# EAGLE board CT_schematic (EAGLE 7.6.0)

Size 100 x 80 mm. Coordinates in mm from the lower left corner, seen from the top.
Outline: 0,0 100,0 100,80 0,80 0,0
Copper layers (1*16): Top 0.035mm / dielectric 1.5mm / Bottom 0.035mm
Design rules "default": minimum track width 10mil, minimum drill 24mil, track to track 8mil, track to pad 8mil, pad to pad 8mil, via to via 8mil, smd to smd 8mil, copper to edge 40mil, drill to drill 8mil, minimum pad ring 10mil, minimum via ring 8mil, stop-mask expansion 4mil, vias tented up to drill 0mil, thermal gap 10mil

## Footprints (pad centres in the part's own frame; a part is rotated, then mirrored left to right if it is on the bottom)
C0603 = smd 0.8 x 0.8: 1 -0.762,0; 2 0.762,0
C0402 = smd 0.5 x 0.5: 1 -0.508,0; 2 0.508,0
C0805 = smd 1.2 x 1.3: 1 -1.016,0; 2 1.016,0
2220 = smd 1.85 x 5.5: 1 -2.55,0; 2 2.55,0
C1210 = smd 1.2 x 2.5: 1 -1.524,0; 2 1.524,0
EXV-9H = smd 3.505 x 1.676: 1 -2.857,0; 2 2.857,0
L0603 = smd 0.8 x 0.8: 1 -0.762,0; 2 0.762,0
L1210 = smd 1.2 x 2.5: 1 -1.524,0; 2 1.524,0
IND_PM3316 = smd 2.921 x 2.794: 1 -5.144,0; 2 5.144,0
PJ-037B_PACKAGE = drill 3.7 square: 1 12,0 | drill 3.2 square: 2 6,0
R0603 = smd 0.8 x 0.8: 1 -0.762,0; 2 0.762,0
WLCSP143 = smd 0.25 x 0.25: A1 -1.999,2.405; A2 -1.599,2.405; A3 -1.199,2.405; A4 -0.799,2.405; A5 -0.399,2.405; A6 0.001,2.405; A7 0.401,2.405; A8 0.801,2.405; A9 1.201,2.405; A10 1.601,2.405; A11 2.001,2.405; B1 -1.999,2.005; B2 -1.599,2.005; B3 -1.199,2.005; B4 -0.799,2.005; B5 -0.399,2.005; B6 0.001,2.005; B7 0.401,2.005; B8 0.801,2.005; B9 1.201,2.005; B10 1.601,2.005; B11 2.001,2.005; C1 -1.999,1.605; C2 -1.599,1.605; C3 -1.199,1.605; C4 -0.799,1.605; C5 -0.399,1.605; C6 0.001,1.605; C7 0.401,1.605; C8 0.801,1.605; C9 1.201,1.605; C10 1.601,1.605; C11 2.001,1.605; D1 -1.999,1.205; D2 -1.599,1.205; D3 -1.199,1.205; D4 -0.799,1.205; D5 -0.399,1.205; D6 0.001,1.205; D7 0.401,1.205; D8 0.801,1.205; D9 1.201,1.205; D10 1.601,1.205; D11 2.001,1.205; E1 -1.999,0.805; E2 -1.599,0.805; E3 -1.199,0.805; E4 -0.799,0.805; E5 -0.399,0.805; E6 0.001,0.805; E7 0.401,0.805; E8 0.801,0.805; E9 1.201,0.805; E10 1.601,0.805; E11 2.001,0.805; F1 -1.999,0.405; F2 -1.599,0.405; F3 -1.199,0.405; F4 -0.799,0.405; F5 -0.399,0.405; F6 0.001,0.405; F7 0.401,0.405; F8 0.801,0.405; F9 1.201,0.405; F10 1.601,0.405; F11 2.001,0.405; G1 -1.999,0.005; G2 -1.599,0.005; G3 -1.199,0.005; G4 -0.799,0.005; G5 -0.399,0.005; G6 0.001,0.005; G7 0.401,0.005; G8 0.801,0.005; G9 1.201,0.005; G10 1.601,0.005; G11 2.001,0.005; H1 -1.999,-0.395; H2 -1.599,-0.395; H3 -1.199,-0.395; H4 -0.799,-0.395; H5 -0.399,-0.395; H6 0.001,-0.395; H7 0.401,-0.395; H8 0.801,-0.395; H9 1.201,-0.395; H10 1.601,-0.395; H11 2.001,-0.395; J1 -1.999,-0.795; J2 -1.599,-0.795; J3 -1.199,-0.795; J4 -0.799,-0.795; J5 -0.399,-0.795; J6 0.001,-0.795; J7 0.401,-0.795; J8 0.801,-0.795; J9 1.201,-0.795; J10 1.601,-0.795; J11 2.001,-0.795; K1 -1.999,-1.195; K2 -1.599,-1.195; K3 -1.199,-1.195; K4 -0.799,-1.195; K5 -0.399,-1.195; K6 0.001,-1.195; K7 0.401,-1.195; K8 0.801,-1.195; K9 1.201,-1.195; K10 1.601,-1.195; K11 2.001,-1.195; L1 -1.999,-1.595; L2 -1.599,-1.595; L3 -1.199,-1.595; L4 -0.799,-1.595; L5 -0.399,-1.595; L6 0.001,-1.595; L7 0.401,-1.595; L8 0.801,-1.595; L9 1.201,-1.595; L10 1.601,-1.595; L11 2.001,-1.595; M1 -1.999,-1.995; M2 -1.599,-1.995; M3 -1.199,-1.995; M4 -0.799,-1.995; M5 -0.399,-1.995; M6 0.001,-1.995; M7 0.401,-1.995; M8 0.801,-1.995; M9 1.201,-1.995; M10 1.601,-1.995; M11 2.001,-1.995; N1 -1.999,-2.395; N2 -1.599,-2.395; N3 -1.199,-2.395; N4 -0.799,-2.395; N5 -0.399,-2.395; N6 0.001,-2.395; N7 0.401,-2.395; N8 0.801,-2.395; N9 1.201,-2.395; N10 1.601,-2.395; N11 2.001,-2.395
SOIC-8 = smd 1.6 x 0.6: 1 -2.7,1.905 | smd 1.55 x 0.6: 2 -2.7,0.635; 3 -2.7,-0.635; 4 -2.7,-1.905; 5 2.7,-1.905; 6 2.7,-0.635; 7 2.7,0.635; 8 2.7,1.905
10100565 = smd 0.8 x 2.35: 1 0,0; 2 1.25,0; 3 2.55,0; 4 4.25,0; 5 5.43,0; 6 6.68,0; 7 7.93,0; 8 9.18,0; 9 11.67,0; 10 14.18,0; 11 15.43,0; 12 16.68,0; 13 17.93,0; 14 19.18,0; 15 21.68,0 | smd 1.5 x 3.1: 16 23.495,-1.375; 20 25.685,-22.875 | smd 1.55 x 3.1: 17 -1.815,-1.375; 21 -1.815,-22.875 | drill 1.1 pad 1.1: 18 21.68,-2.375; 19 0.68,-2.375
SSOP-16 = smd 1.981 x 0.356: 1 -2.464,2.223; 2 -2.464,1.587; 3 -2.464,0.953; 4 -2.464,0.318; 5 -2.464,-0.318; 6 -2.464,-0.953; 7 -2.464,-1.587; 8 -2.464,-2.223; 9 2.464,-2.223; 10 2.464,-1.587; 11 2.464,-0.953; 12 2.464,-0.318; 13 2.464,0.318; 14 2.464,0.953; 15 2.464,1.587; 16 2.464,2.223
HTSS-105-01-G-D = drill 1 pad 1.8 square: 1 0,0 | drill 1 pad 1.8: 2 0,2.54; 3 2.54,0; 4 2.54,2.54; 5 5.08,0; 6 5.08,2.54; 7 7.62,0; 8 7.62,2.54; 9 10.16,0; 10 10.16,2.54
182-009-MALE = drill 1.194 pad 1.524 octagon: 1 -5.537,10.923; 2 -2.769,10.923; 3 0,10.923; 4 2.769,10.923; 5 5.537,10.923; 6 -4.153,8.08; 7 -1.384,8.08; 8 1.384,8.08; 9 4.153,8.08 | hole 3.048: -12.446,9.501; 12.446,9.501
TSSOP20-I = smd 0.4 x 1.35: 1 -2.925,-2.875; 2 -2.275,-2.875; 3 -1.625,-2.875; 4 -0.975,-2.875; 5 -0.325,-2.875; 6 0.325,-2.875; 7 0.975,-2.875; 8 1.625,-2.875; 9 2.275,-2.875; 10 2.925,-2.875; 11 2.925,2.875; 12 2.275,2.875; 13 1.625,2.875; 14 0.975,2.875; 15 0.325,2.875; 16 -0.325,2.875; 17 -0.975,2.875; 18 -1.625,2.875; 19 -2.275,2.875; 20 -2.925,2.875
ABLS-25.000MHZ-B2F-T = smd 5.6 x 2.8: 1 -3.81,0; 2 5.69,0
ASEK = smd 1.4 x 1: 1 -1.1,-0.8; 2 1.1,-0.8; 3 1.1,0.8; 4 -1.1,0.8
QFN-16_EP = smd 0.805 x 0.3: 1 -1.452,0.75; 2 -1.452,0.25; 3 -1.452,-0.25; 4 -1.452,-0.75; 9 1.452,-0.75; 10 1.452,-0.25; 11 1.452,0.25; 12 1.452,0.75 | smd 0.3 x 0.805: 5 -0.75,-1.452; 6 -0.25,-1.452; 7 0.25,-1.452; 8 0.75,-1.452; 13 0.75,1.452; 14 0.25,1.452; 15 -0.25,1.452; 16 -0.75,1.452 | smd 1.55 x 1.55: 17 0,0
DFN-8_DDB = smd 0.805 x 0.3: 1 -0.952,0.75; 2 -0.952,0.25; 3 -0.952,-0.25; 4 -0.952,-0.75; 5 0.952,-0.75; 6 0.952,-0.25; 7 0.952,0.25; 8 0.952,0.75 | smd 0.61 x 2.2: 9 0,0
SON-6 = smd 0.55 x 0.3: 1 -0.355,0.5 | smd 0.52 x 0.3: 2 -0.37,0; 3 -0.37,-0.5; 4 0.37,-0.5; 5 0.37,0; 6 0.37,0.5
SW_4-1437565-2 = smd 1.4 x 2.1: 1 -2.23,4.55; 2 -2.23,-4.55; 3 2.23,4.55; 4 2.23,-4.55
LGM67K-G1J2-24-Z = smd 0.8 x 1.4: A -2,0; C 0,0
NC7SZ125M5X = smd 1.3 x 0.7: 1 -1.3,0.95; 2 -1.3,0; 3 -1.3,-0.95; 4 1.3,-0.95; 5 1.3,0.95
DUMMY_PACKAGE_222 = drill 0.3: 1 0,-1; 2 1.5,-1; 3 3,-1

## Placement (x,y rotation side)
C1  1e-06  [C0603]  -26.67,85.09 0 top  (outside the outline)
C2  1e-07  [C0603]  -30.48,85.09 0 top  (outside the outline)
C3  1e-07  [C0603]  -34.29,85.09 0 top  (outside the outline)
C4  1e-07  [C0603]  -38.1,85.09 0 top  (outside the outline)
C5  1e-07  [C0603]  -41.91,85.09 0 top  (outside the outline)
C6  1e-07  [C0603]  -45.72,85.09 0 top  (outside the outline)
C7  1e-07  [C0603]  -49.53,85.09 0 top  (outside the outline)
C8  1e-07  [C0603]  -53.34,85.09 0 top  (outside the outline)
C9  1e-07  [C0603]  -57.15,85.09 0 top  (outside the outline)
C10  1e-07  [C0603]  -60.96,85.09 0 top  (outside the outline)
C11  1e-07  [C0603]  -64.77,85.09 0 top  (outside the outline)
C12  1e-07  [C0603]  -68.58,85.09 0 top  (outside the outline)
C13  1e-07  [C0603]  -72.39,85.09 0 top  (outside the outline)
C14  1e-07  [C0603]  -76.2,85.09 0 top  (outside the outline)
C15  1e-07  [C0603]  -80.01,85.09 0 top  (outside the outline)
C16  4.7e-06  [C0603]  -80.01,80.01 0 top  (outside the outline)
C17  1e-08  [C0603]  -83.82,85.09 0 top  (outside the outline)
C18  1e-06  [C0603]  -87.63,85.09 0 top  (outside the outline)
C19  1e-07  [C0603]  -15.24,90.17 0 top  (outside the outline)
C20  2.2e-06  [C0603]  -83.82,80.01 0 top  (outside the outline)
C21  2.2e-06  [C0603]  -87.63,80.01 0 top  (outside the outline)
C22  1e-11  [C0402]  -72.39,90.17 0 top  (outside the outline)
C23  1e-11  [C0402]  -76.2,90.17 0 top  (outside the outline)
C24  1e-08  [C0402]  -80.01,90.17 0 top  (outside the outline)
C25  1e-07  [C0402]  -83.82,90.17 0 top  (outside the outline)
C26  1e-05  [C0805]  -83.82,67.31 0 top  (outside the outline)
C27  1e-06  [C0603]  -19.05,90.17 0 top  (outside the outline)
C28  1e-06  [C0603]  -22.86,90.17 0 top  (outside the outline)
C29  2.2e-07  [C0603]  -15.24,85.09 0 top  (outside the outline)
C30  1e-06  [C0603]  -26.67,90.17 0 top  (outside the outline)
C31  1e-06  [C0603]  -30.48,90.17 0 top  (outside the outline)
C32  1e-06  [C0603]  -34.29,90.17 0 top  (outside the outline)
C33  1e-06  [C0603]  -38.1,90.17 0 top  (outside the outline)
C34  1e-07  [C0402]  -87.63,90.17 0 top  (outside the outline)
C35  1e-07  [C0402]  -15.24,95.25 0 top  (outside the outline)
C36  1e-07  [C0402]  -19.05,95.25 0 top  (outside the outline)
C37  1e-07  [C0402]  -22.86,95.25 0 top  (outside the outline)
C38  1e-07  [C0402]  -26.67,95.25 0 top  (outside the outline)
C39  1e-07  [C0402]  -30.48,95.25 0 top  (outside the outline)
C40  1e-08  [C0402]  -34.29,95.25 0 top  (outside the outline)
C41  1e-05  [C0805]  -15.24,74.93 0 top  (outside the outline)
C42  1e-06  [C0603]  -41.91,90.17 0 top  (outside the outline)
C43  1e-07  [C0402]  -38.1,95.25 0 top  (outside the outline)
C44  6.8e-05  [2220]  -46.99,59.69 0 top  (outside the outline)
C45  1e-05  [C1210]  -59.69,67.31 0 top  (outside the outline)
C46  2.2e-06  [C0603]  -19.05,85.09 0 top  (outside the outline)
C47  2.2e-07  [C0603]  -22.86,85.09 0 top  (outside the outline)
C48  1e-07  [C0402]  -41.91,95.25 0 top  (outside the outline)
C49  0.0001  [EXV-9H]  -76.2,58.42 0 top  (outside the outline)
C50  0.0001  [EXV-9H]  -17.78,68.58 0 top  (outside the outline)
C51  1e-08  [C0402]  -45.72,95.25 0 top  (outside the outline)
F1  240.0  [L0603]  -45.72,90.17 0 top  (outside the outline)
I1  1e-05  [L1210]  -66.04,67.31 0 top  (outside the outline)
I2  1.5e-06  [IND_PM3316]  -20.32,49.53 0 top  (outside the outline)
I3  1e-05  [L1210]  -72.39,67.31 0 top  (outside the outline)
J1  PJ-037B  [PJ-037B_PACKAGE]  -27.94,36.83 0 top  (outside the outline)
R2  1000.0  [R0603]  -49.53,90.17 0 top  (outside the outline)
R7  4700.0  [R0603]  -53.34,90.17 0 top  (outside the outline)
R8  10000.0  [R0603]  -30.48,80.01 0 top  (outside the outline)
R9  10000.0  [R0603]  -35.56,80.01 0 top  (outside the outline)
R10  10000.0  [R0603]  -40.64,80.01 0 top  (outside the outline)
R11  10000.0  [R0603]  -45.72,80.01 0 top  (outside the outline)
R12  10000.0  [R0603]  -50.8,80.01 0 top  (outside the outline)
R13  10000.0  [R0603]  -55.88,80.01 0 top  (outside the outline)
R14  100000.0  [R0603]  -20.32,74.93 0 top  (outside the outline)
R15  100000.0  [R0603]  -25.4,74.93 0 top  (outside the outline)
R16  100000.0  [R0603]  -30.48,74.93 0 top  (outside the outline)
R17  100000.0  [R0603]  -35.56,74.93 0 top  (outside the outline)
R18  100000.0  [R0603]  -40.64,74.93 0 top  (outside the outline)
R19  100000.0  [R0603]  -45.72,74.93 0 top  (outside the outline)
R20  100000.0  [R0603]  -50.8,74.93 0 top  (outside the outline)
R21  100000.0  [R0603]  -55.88,74.93 0 top  (outside the outline)
R22  100000.0  [R0603]  -60.96,74.93 0 top  (outside the outline)
R23  100000.0  [R0603]  -66.04,74.93 0 top  (outside the outline)
R24  100000.0  [R0603]  -71.12,74.93 0 top  (outside the outline)
R25  100000.0  [R0603]  -76.2,74.93 0 top  (outside the outline)
R26  120.0  [R0603]  -57.15,90.17 0 top  (outside the outline)
R27  20000.0  [R0603]  -60.96,80.01 0 top  (outside the outline)
R28  91000.0  [R0603]  -66.04,80.01 0 top  (outside the outline)
R29  300000.0  [R0603]  -81.28,74.93 0 top  (outside the outline)
R30  100000.0  [R0603]  -86.36,74.93 0 top  (outside the outline)
R31  560000.0  [R0603]  -15.24,80.01 0 top  (outside the outline)
R32  10000.0  [R0603]  -71.12,80.01 0 top  (outside the outline)
R33  10000.0  [R0603]  -76.2,80.01 0 top  (outside the outline)
R34  9100.0  [R0603]  -60.96,90.17 0 top  (outside the outline)
R35  680000.0  [R0603]  -20.32,80.01 0 top  (outside the outline)
R36  120000.0  [R0603]  -25.4,80.01 0 top  (outside the outline)
U1  STM32F746ZGY6  [WLCSP143]  -39.37,49.53 0 top  (outside the outline)
U2  AT25128B-SSHL-T  [SOIC-8]  -24.13,59.69 0 top  (outside the outline)
U3  10100565  [10100565]  -40.64,25.4 0 top  (outside the outline)
U4  LTC2804CGN-1#PBF  [SSOP-16]  -80.01,35.56 0 top  (outside the outline)
U5  HTSS-105-01-G-D  [HTSS-105-01-G-D]  -58.42,48.26 0 top  (outside the outline)
U6  MCP2562-E/SN  [SOIC-8]  -38.1,59.69 0 top  (outside the outline)
U7  182-009-113R531  [182-009-MALE]  -67.31,6.35 0 top  (outside the outline)
U8  SP3203ECY-L/TR  [TSSOP20-I]  -59.69,35.56 0 top  (outside the outline)
U9  HTSS-105-01-G-D  [HTSS-105-01-G-D]  -77.47,48.26 0 top  (outside the outline)
U10  ABLS-25.000MHZ-B2F-T  [ABLS-25.000MHZ-B2F-T]  -36.83,68.58 0 top  (outside the outline)
U11  ASEK-32.768KHz-ECST  [ASEK]  -67.31,58.42 0 top  (outside the outline)
U12  LTC3601EUD#PBF  [QFN-16_EP]  -66.04,90.17 0 top  (outside the outline)
U13  LT3494AEDDB#TRMPBF  [DFN-8_DDB]  -49.53,95.25 0 top  (outside the outline)
U14  TPS3895ADRYR  [SON-6]  -60.96,93.98 0 top  (outside the outline)
U15  4-1437565-2  [SW_4-1437565-2]  -44.45,35.56 0 top  (outside the outline)
U16  Q65110A2395  [LGM67K-G1J2-24-Z]  -48.26,67.31 0 top  (outside the outline)
U17  nc7sz125m5x  [NC7SZ125M5X]  -77.47,66.04 0 top  (outside the outline)
U18  Dummy  [DUMMY_PACKAGE_222]  -58.42,95.25 0 top  (outside the outline)

## Library data of the parts
C1-C51 F1 I1-I3 J1 R2 R7-R36 U1-U18 = circuit_tree

## Nets
CLK_CRYSTAL_U1_H10: C22.1 U1.H10 U10.1
CLK_CRYSTAL_U1_J11: C23.1 U1.J11 U10.2
CLK_U1_D11: U1.D11 U11.3
GND: C1.2 C2.2 C3.2 C4.2 C5.2 C6.2 C7.2 C8.2 C9.2 C10.2 C11.2 C12.2 C13.2 C14.2 C15.2 C16.2 C17.2 C18.2 C19.2 C20.2 C21.2 C22.2 C23.2 C24.2 C25.2 C26.2 C27.2 C28.2 C30.2 C31.2 C32.2 C33.2 C34.2 C35.2 C38.2 C39.2 C40.2 C41.2 C42.2 C44.1 C44.2 C45.2 C46.2 C47.2 C48.2 C49.2 C50.2 C51.2 J1.2 R2.2 R8.2 R10.2 R27.2 R29.2 R34.2 R36.2 U1.D2 U1.E7 U1.F5 U1.H2 U1.H3 U1.H7 U1.K10 U2.4 U3.6 U3.10 U3.12 U3.16 U3.17 U3.20 U3.21 U4.8 U5.9 U6.2 U6.8 U7.5 U8.18 U9.9 U11.2 U12.1 U12.9 U12.17 U13.2 U13.9 U14.2 U16.C U17.1 U17.3 U18.1
NET_U1_A11: R9.1 U1.A11
NET_U1_C9: R8.1 U1.C9
NET_U1_D1: C21.1 U1.D1
NET_U1_H9: R7.1 U1.H9 U17.4
NET_U1_L10: C17.1 C18.1 F1.1 U1.L10 U1.L11
NET_U1_N2: C20.1 U1.N2
NET_U1_N9: U16.A
NET_U1_N10: U15.3 U15.4
NET_U1_N11: R10.1 U1.N11
NET_U2_3: R11.1 U2.3
NET_U2_7: R13.1 U2.7
NET_U3_1: R16.1 U3.1
NET_U3_2: R15.1 U3.2
NET_U3_18: U3.18 U3.19
NET_U4_6: C27.1 U4.6
NET_U4_7: C29.1 I1.2 U4.7
NET_U4_9: C28.1 U4.9
NET_U4_10: C29.2 U4.10
NET_U4_11: R25.1 U4.11
NET_U5_3: U4.1 U5.3
NET_U5_4: U4.2 U5.4
NET_U5_5: U4.3 U5.5
NET_U5_6: U4.4 U5.6
NET_U6_6: R26.2 U6.6
NET_U7_2: R26.2 U6.6 U7.2
NET_U7_3: R26.1 U6.7 U7.3
NET_U8_1: C36.1 U8.1
NET_U8_2: C38.1 U8.2
NET_U8_3: C36.2 U8.3
NET_U8_4: C37.1 U8.4
NET_U8_5: C37.2 U8.5
NET_U8_6: C39.1 U8.6
NET_U8_20: U8.20
NET_U9_3: U8.14 U9.3
NET_U9_4: U8.13 U9.4
NET_U9_5: U8.17 U9.5
NET_U9_6: U8.16 U9.6
NET_U12_3: C43.2 I2.1 U12.3 U12.4
NET_U12_6: C43.1 U12.6
NET_U12_7: C42.1 U12.7 U12.12
NET_U12_10: R29.1 U12.10
NET_U12_11: R27.1 R28.1 U12.11
NET_U12_14: U12.14
NET_U12_ATNET_3: I2.2 R28.2
NET_U13_1: I3.1 U13.1
NET_U13_5: R30.1 U13.5
NET_U13_6: R31.1 U13.6
NET_U13_8: C47.1 U13.8
NET_U14_1: R33.1 R34.1 U14.1
NET_U14_3: R35.2 R36.1 U14.3
NET_U14_4: R32.1 U14.4 U17.2
NET_U15_1: R2.1 U15.1 U15.2
PROC_ADC1_IN3: U1.M11 U18.2
PROC_ADC1_IN5: U1.M9 U18.3
PROC_CAN1_RX: U1.B3 U6.4
PROC_CAN1_TX: U1.C4 U6.1
PROC_SDMMC1_CK: R14.1 U1.C3 U3.8
PROC_SDMMC1_D0: R17.1 U1.E4 U3.4
PROC_SDMMC1_D1: R18.1 U1.E3 U3.3
PROC_SDMMC1_D2: R19.1 U1.A2 U3.15
PROC_SDMMC1_D3: R20.1 U1.B2 U3.14
PROC_SDMMC1_D4: R21.1 U1.A9 U3.13
PROC_SDMMC1_D5: R22.1 U1.B9 U3.11
PROC_SDMMC1_D6: R23.1 U1.F2 U3.7
PROC_SDMMC1_D7: R24.1 U1.F3 U3.5
PROC_SPI1_MISO: U1.C7 U2.2
PROC_SPI1_MOSI: U1.C8 U2.5
PROC_SPI1_NSS: R12.1 U1.M10 U2.1
PROC_SPI1_SCK: U1.B7 U2.6
PROC_UART4_CTS: U1.N8 U4.13
PROC_UART4_RTS: U1.C2 U4.15
PROC_UART4_RX: U1.K8 U4.16
PROC_UART4_TX: U1.K9 U4.14
PROC_UART7_CTS: U1.G8 U8.8
PROC_UART7_RTS: U1.H11 U8.10
PROC_UART7_RX: U1.G10 U8.11
PROC_UART7_TX: U1.F7 U8.7
VCC_S1_4V6: C41.1 C45.1 C49.1 C50.1 I3.2 J1.1 R30.2 U12.15 U12.16 U13.3 U13.4
VCC_TIER1_3V3: C1.1 C2.1 C3.1 C4.1 C5.1 C6.1 C7.1 C8.1 C9.1 C10.1 C11.1 C12.1 C13.1 C14.1 C15.1 C16.1 C19.1 C24.1 C25.1 C26.1 C30.1 C31.1 C33.1 C34.1 C35.1 C40.1 C44.2 C48.1 C51.1 F1.2 I1.1 I2.2 R7.2 R9.2 R11.2 R12.2 R13.2 R14.2 R15.2 R16.2 R17.2 R18.2 R19.2 R20.2 R21.2 R22.2 R23.2 R24.2 R25.2 R28.2 R32.2 R33.2 R35.1 U1.A1 U1.C1 U1.C5 U1.C11 U1.D7 U1.E6 U1.E10 U1.G1 U1.G7 U1.J5 U1.J6 U1.J7 U1.J8 U1.L1 U2.8 U3.9 U4.5 U4.12 U6.5 U8.12 U8.19 U11.4 U12.8 U14.6 U17.5
VCC_TIER1_5V0: C32.1 C46.1 R31.2 U6.3 U13.7

## Tracks (layer width: path | path; a pad name or v marks a point on that pad's centre or on a via)
CLK_CRYSTAL_U1_H10  (2 unrouted)
CLK_CRYSTAL_U1_J11  (2 unrouted)
CLK_U1_D11  (1 unrouted)
GND  (88 unrouted)
NET_U1_A11  (1 unrouted)
NET_U1_C9  (1 unrouted)
NET_U1_D1  (1 unrouted)
NET_U1_H9  (2 unrouted)
NET_U1_L10  (4 unrouted)
NET_U1_N2  (1 unrouted)
NET_U1_N10  (1 unrouted)
NET_U1_N11  (1 unrouted)
NET_U2_3  (1 unrouted)
NET_U2_7  (1 unrouted)
NET_U3_1  (1 unrouted)
NET_U3_2  (1 unrouted)
NET_U3_18  (1 unrouted)
NET_U4_6  (1 unrouted)
NET_U4_7  (2 unrouted)
NET_U4_9  (1 unrouted)
NET_U4_10  (1 unrouted)
NET_U4_11  (1 unrouted)
NET_U5_3  (1 unrouted)
NET_U5_4  (1 unrouted)
NET_U5_5  (1 unrouted)
NET_U5_6  (1 unrouted)
NET_U6_6  (1 unrouted)
NET_U7_2  (2 unrouted)
NET_U7_3  (2 unrouted)
NET_U8_1  (1 unrouted)
NET_U8_2  (1 unrouted)
NET_U8_3  (1 unrouted)
NET_U8_4  (1 unrouted)
NET_U8_5  (1 unrouted)
NET_U8_6  (1 unrouted)
NET_U9_3  (1 unrouted)
NET_U9_4  (1 unrouted)
NET_U9_5  (1 unrouted)
NET_U9_6  (1 unrouted)
NET_U12_3  (3 unrouted)
NET_U12_6  (1 unrouted)
NET_U12_7  (2 unrouted)
NET_U12_10  (1 unrouted)
NET_U12_11  (2 unrouted)
NET_U12_ATNET_3  (1 unrouted)
NET_U13_1  (1 unrouted)
NET_U13_5  (1 unrouted)
NET_U13_6  (1 unrouted)
NET_U13_8  (1 unrouted)
NET_U14_1  (2 unrouted)
NET_U14_3  (2 unrouted)
NET_U14_4  (2 unrouted)
NET_U15_1  (2 unrouted)
PROC_ADC1_IN3  (1 unrouted)
PROC_ADC1_IN5  (1 unrouted)
PROC_CAN1_RX  (1 unrouted)
PROC_CAN1_TX  (1 unrouted)
PROC_SDMMC1_CK  (2 unrouted)
PROC_SDMMC1_D0  (2 unrouted)
PROC_SDMMC1_D1  (2 unrouted)
PROC_SDMMC1_D2  (2 unrouted)
PROC_SDMMC1_D3  (2 unrouted)
PROC_SDMMC1_D4  (2 unrouted)
PROC_SDMMC1_D5  (2 unrouted)
PROC_SDMMC1_D6  (2 unrouted)
PROC_SDMMC1_D7  (2 unrouted)
PROC_SPI1_MISO  (1 unrouted)
PROC_SPI1_MOSI  (1 unrouted)
PROC_SPI1_NSS  (2 unrouted)
PROC_SPI1_SCK  (1 unrouted)
PROC_UART4_CTS  (1 unrouted)
PROC_UART4_RTS  (1 unrouted)
PROC_UART4_RX  (1 unrouted)
PROC_UART4_TX  (1 unrouted)
PROC_UART7_CTS  (1 unrouted)
PROC_UART7_RTS  (1 unrouted)
PROC_UART7_RX  (1 unrouted)
PROC_UART7_TX  (1 unrouted)
VCC_S1_4V6  (10 unrouted)
VCC_TIER1_3V3  (77 unrouted)
VCC_TIER1_5V0  (4 unrouted)